# Altium PCB Router2.PcbDoc
Units mil, origin at the board's own origin, x right, y up, seen from the top; angles counter-clockwise.
Board outline 6000 x 4000 mil, 2 copper layers (Top Layer, Bottom Layer); 56 components, 29 nets, 161 pads, 14 vias.
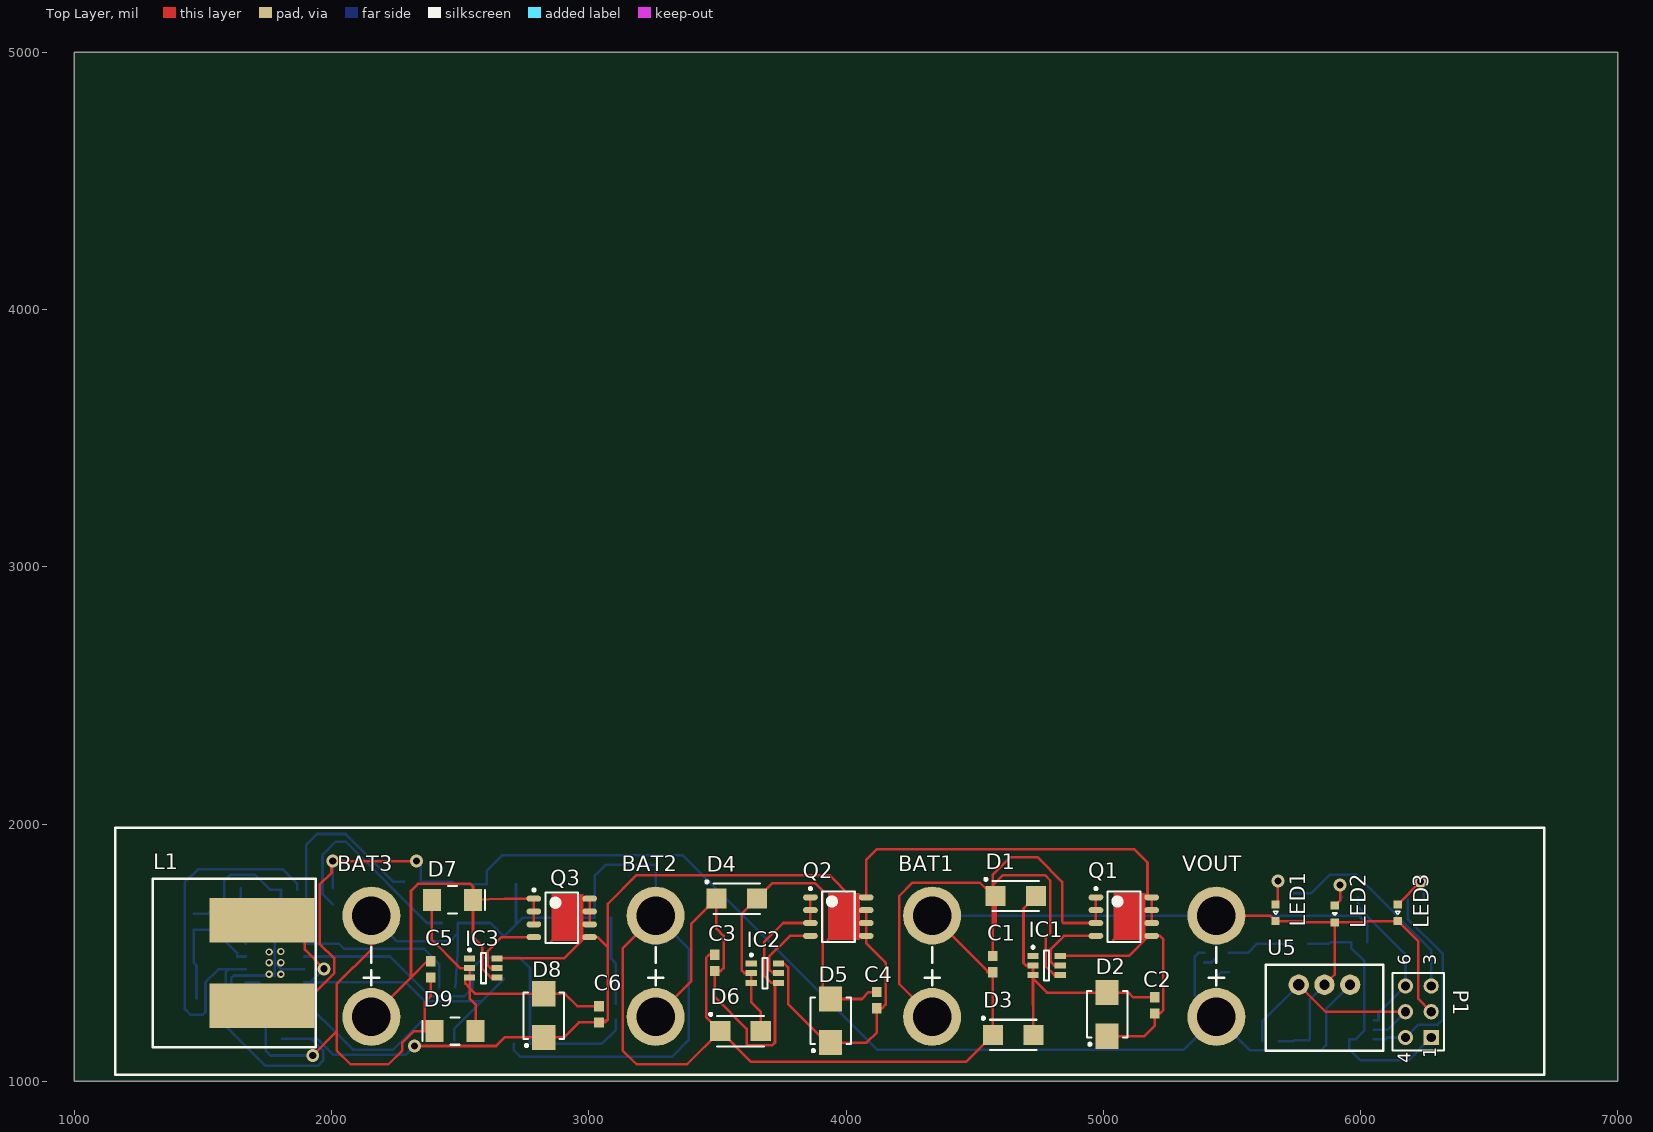
[diagram p0: Top Layer view]
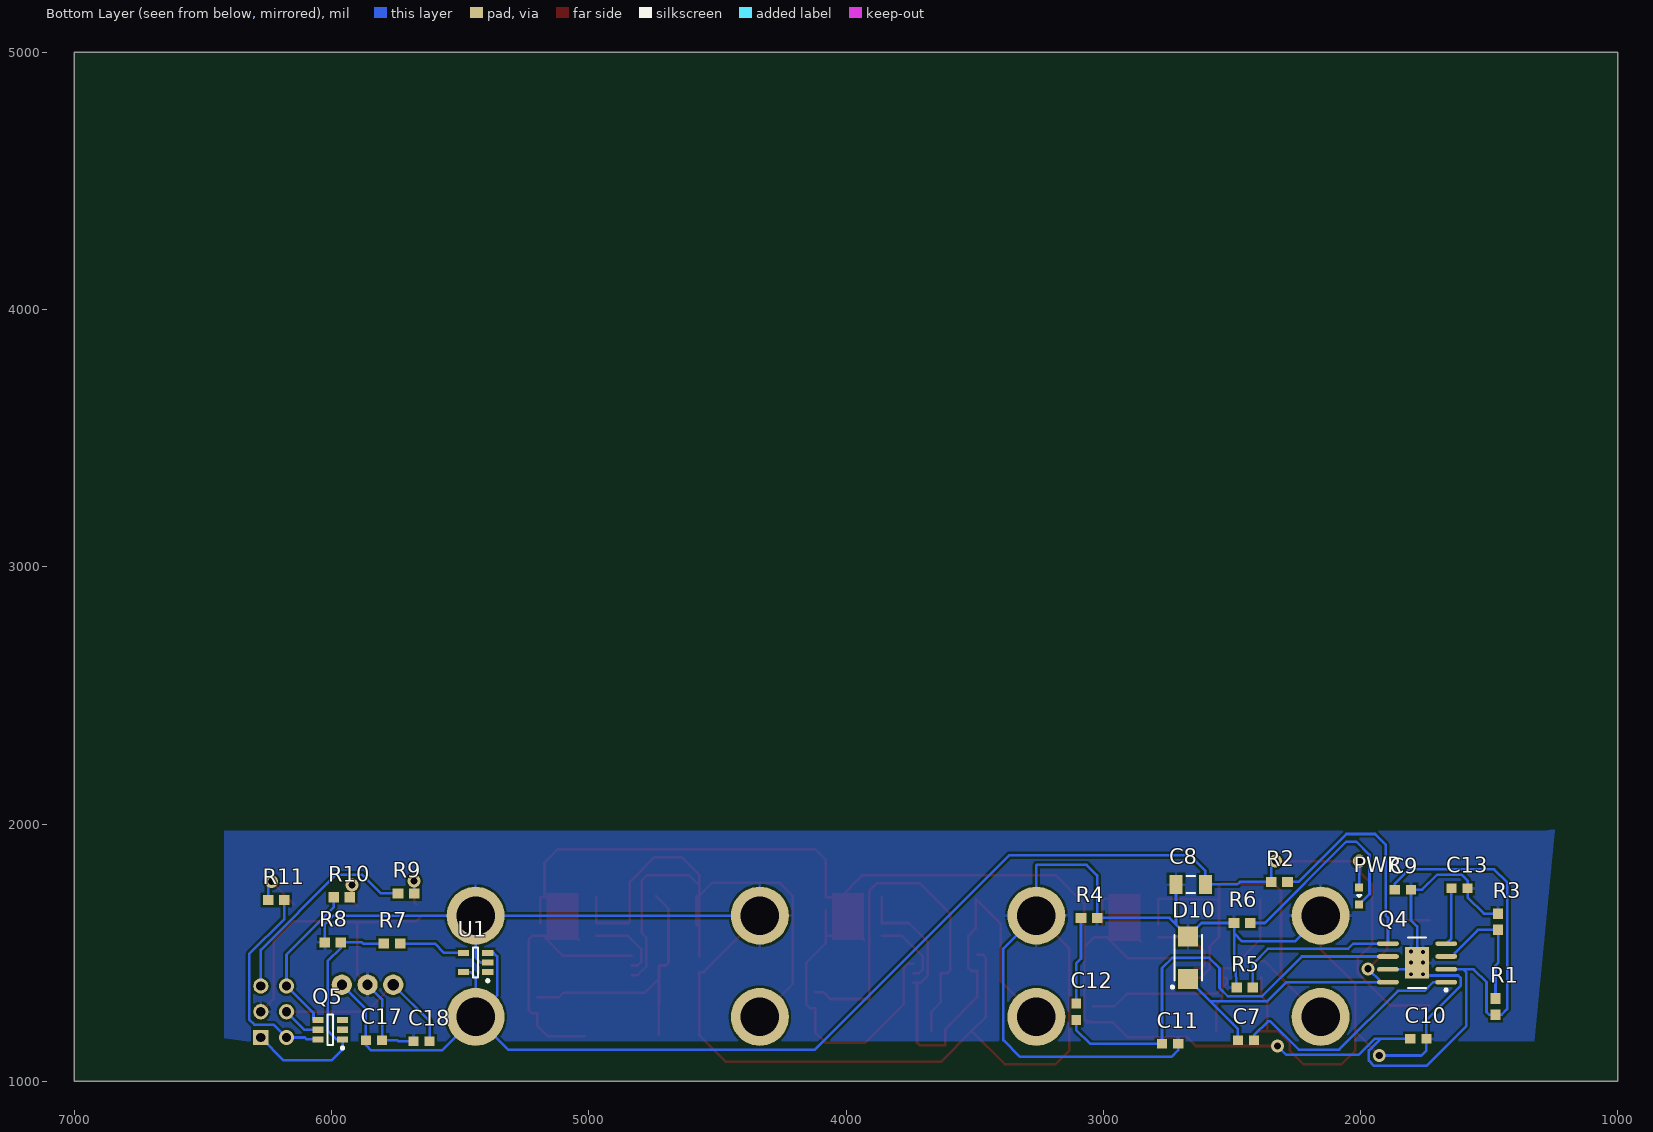
[diagram p1: Bottom Layer view, seen from below]

## Layer stack, top to bottom
Top Layer: signal copper 1.4
Dielectric: dielectric 12.6, FR-4, Dk 4.8
Bottom Layer: signal copper 1.4

## Board outline
1000,1000 7000,1000 7000,5000 1000,5000

## Design rules (kind name [scope] priority, off if disabled: settings)
Clearance [All] p1: gap=10
PolygonConnect [All] p1: connectstyle=Relief reliefconductorwidth=10 reliefentries=4 polygonreliefangle="90 Angle" airgapwidth=10
RoutingVias [All] p1: holewidth=28 width=50 viastyle="Through Hole" minholewidth=28 minwidth=50 maxholewidth=28 maxwidth=50
SolderMaskExpansion [All] p1: expansion=4
Width [All] p1: maxlimit=100 minlimit=10 preferedwidth=10
28 further rules are at their usual default settings.

## Classes and differential pairs
component class Switching_Regulator: C7 C8 C9 C10 C11 C12 C13 D10 L1 PWR Q4 R1 R2 R3 R4 R5 R6 VOUT
component class RouterBatteryLED: C17 C18 LED1 LED2 LED3 P1 Q5 R7 R8 R9 R10 R11 U1 U5
component class Batteries: BAT1 BAT2 BAT3 C1 C2 C3 C4 C5 C6 D1 D2 D3 D4 D5 D6 D7 D8 D9 IC1 IC2 IC3 Q1 Q2 Q3

## Components (designator, comment, footprint, x,y, rotation, side; value= is the part's Value field where it differs from the comment)
BAT1 "BATWIRE" BATWIRE12 4335,1250 r90 top
BAT2 "BATWIRE" BATWIRE12 3260,1250 r90 top
BAT3 "BATWIRE" BATWIRE12 2155,1250 r90 top
C1 "Cap" CAPC0603 4570,1455 r270 top
C2 "Cap" CAPC0603 5200,1295 r90 top
C3 "Cap" CAPC0603 3490,1460 r90 top
C4 "Cap" CAPC0603 4120,1315 r90 top
C5 "Cap" CAPC0603 2385,1435 r270 top
C6 "Cap" CAPC0603 3040,1260 r90 top
C7 "Cap" CAPC0603 2445,1160 r180 bottom
C8 "Cap" CAPC1206 2660,1765 r0 bottom
C9 "Cap" CAPC0603 1835,1745 r180 bottom
C10 "Cap" CAPC0603 1775,1165 r180 bottom
C11 "Cap" CAPC0603 2740,1145 r180 bottom
C12 "Cap" CAPC0603 3105,1270 r90 bottom
C13 "Cap" CAPC0603 1615,1750 r180 bottom
C17 "Cap" CAPC0603 5835,1160 r180 bottom
C18 "Cap" CAPC0603 5650,1155 r0 bottom
D1 "SS16T3G" SS16T3G 4660,1720 r0 top
D2 "SMBJ100A-13-F" SMBJ100A-13-F 5015,1260 r90 top
D3 "SS16T3G" SS16T3G 4650,1180 r0 top
D4 "SS16T3G" SS16T3G 3575,1710 r0 top
D5 "SMBJ100A-13-F" SMBJ100A-13-F 3940,1235 r90 top
D6 "SS16T3G" SS16T3G 3590,1195 r0 top
D7 "SS16T3G" SS110-TP 2470,1705 r180 top
D8 "SMBJ100A-13-F" SMBJ100A-13-F 2825,1255 r90 top
D9 "SS16T3G" SS110-TP 2480,1195 r0 top
D10 "DFLS160" RSX501L-20TE25 2670,1480 r90 bottom
IC1 "LM5050MK-2/NOPB" LM5050MK-2/NOPB 4780,1450 r0 top
IC2 "LM5050MK-2/NOPB" LM5050MK-2/NOPB 3685,1420 r0 top
IC3 "LM5050MK-2/NOPB" LM5050MK-2/NOPB 2590,1440 r0 top
L1 "37392C" 37392C 1730,1625 r180 top
LED1 "LED" LED0603 5670,1655 r270 top
LED2 "LED" LED0603 5900,1650 r270 top
LED3 "LED" LED0603 6145,1655 r270 top
P1 "Header 3X2A" HDR2X3_CEN 6275,1170 r90 top
PWR "LED" LED0603 2005,1720 r270 bottom
Q1 "TPCA8052-H(TE12LQM" TPCA8052-H(TE12LQM 5080,1640 r0 top
Q2 "TPCA8052-H(TE12LQM" TPCA8052-H(TE12LQM 3970,1640 r0 top
Q3 "TPCA8052-H(TE12LQM" TPCA8052-H(TE12LQM 2895,1635 r0 top
Q4 "TPS54332DDA" TPS54332DDA 1780,1460 r0 bottom
Q5 "ATTiny5 Atmel Processor" ATTiny5 6005,1200 r0 bottom
R1 "Res" RES0603 1475,1290 r90 bottom
R2 "Res" RES0603 2315,1775 r0 bottom
R3 "Res" RES0603 1465,1620 r90 bottom
R4 "Res" RES0603 3055,1635 r180 bottom
R5 "Res" RES0603 2450,1365 r180 bottom
R6 "Res" RES0603 2460,1615 r0 bottom
R7 "Res" RES0603 5765,1535 r180 bottom
R8 "Res" RES0603 5995,1540 r0 bottom
R9 "Res" RES0603 5710,1730 r180 bottom
R10 "Res" RES0603 5960,1715 r180 bottom
R11 "Res" RES0603 6215,1705 r0 bottom
U1 "IC OPAMP GP 600KHZ TSOT23-5" SOT95P280X100-5N 5440,1461.54 r0 bottom
U5 "R-78C5.0-1.0" R-78C5.0-1.0 5960,1375 r180 top
VOUT "BATWIRE" BATWIRE12 5440,1250 r90 top

## Footprints (in the part's own frame and the unit in brackets; to place one, negate y for a bottom-side part, rotate by r counter-clockwise, add the part's x,y. Pads: shape width x height; smd on the part's side, far side on the other; paste and mask are expansions set on the pad)
37392C [mm] "INDUCTOR 3.90UH 10.0A SMD"
  rect 10.4x4.4 smd: 0(0,8.4) 1(0,0)
  silkscreen extent -5.3,-4.1 10.8,12.5, body extent -5.5,-4.3 11,12.6, height 6.8
ATTiny5 [mm] "SOT23, 6-Leads, Body 2.90x2.80mm, Pitch 0.95mm, IPC Medium Density"
  rect 1.1x0.6 smd: 1(-1.2,0.95) 2(-1.2,0) 3(-1.2,-0.95) 4(1.2,-0.95) 5(1.2,0) 6(1.2,0.95)
  silkscreen extent -1.32,-1.5 0.25,1.92, body extent -0.87,-1.5 0.87,1.5, height 1.45
BATWIRE12 [mm] "Two 12AWG wires soldered directly to the board"
  round 5.715 hole 3.81: +(0,0) -(10,0)
  silkscreen extent 3.13,-0.75 6.87,0.75
CAPC0603 [mm] "Chip Capacitor, 2-Leads, Body 1.60x0.80mm, IPC Medium Density"
  rect 1x0.95 smd: 1(-0.8,0) 2(0.8,0)
  body extent -0.88,-0.48 0.87,0.48, height 0.8
CAPC1206 [mm] "Chip Capacitor, 2-Leads, Body 3.20x1.60mm, IPC Medium Density"
  rect 1.3x1.85 smd: 1(-1.45,0) 2(1.45,0)
  silkscreen extent -0.4,-0.82 0.4,0.82, body extent -1.7,-0.9 1.7,0.9, height 1.8
HDR2X3_CEN [mm] "Connector; Header; 3x2 Position"
  rect 1.5x1.5 hole 0.9: 1(0,0)
  round 1.5 hole 0.9: 2(2.54,0) 3(5.08,0) 4(0,2.54) 5(2.54,2.54) 6(5.08,2.54)
  silkscreen extent -1.27,-1.27 6.35,3.81
LED0603 [mm] "Chip LED, 2-Leads, Body 1.60x0.80mm, IPC Medium Density"
  rect 0.8x0.8 smd: A(-0.825,0) C(0.825,0)
  silkscreen extent -0.13,-0.25 0.13,0.25, body extent -0.88,-0.48 0.87,0.47, height 0.8
LM5050MK-2/NOPB [mm] "IC OR CTRLR N+1 6SOT"
  rect 1.1x0.6 smd: 1(-1.35,0.95) 2(-1.35,0) 3(-1.35,-0.95) 4(1.35,-0.95) 5(1.35,0) 6(1.35,0.95)
  silkscreen extent -1.47,-1.5 0.25,1.92, body extent -0.87,-1.52 0.87,1.53, height 1.1
R-78C5.0-1.0 [mm] "CONV DC/DC 1A 5V OUT SIP VERT"
  round 2 hole 1: 1(0,0) 2(2.54,0)
  round 2 hole 1.15: 3(5.08,0)
  silkscreen extent -3.26,-2 8.34,6.5, body extent -3.2,-1.9 8.3,6.5, height 10.8
RES0603 [mm] "Chip Resistor, 2-Leads, Body 1.60x0.80mm, IPC Medium Density"
  rect 1.05x1 smd: 1(-0.8,0) 2(0.8,0)
  body extent -0.88,-0.48 0.87,0.47, height 0.8
RSX501L-20TE25 [mm] "DIODE SCHOTTKY 20V 5A PMDS"
  rect 2x2 smd: A(2.1,0) C(-2.1,0)
  silkscreen extent -3.02,-1.35 2.25,1.68, body extent -2.25,-1.3 2.25,1.3, height 2
SMBJ100A-13-F [mm] "TVS DIODE 100VWM 162VC SMB"
  rect 2.5x2.3 smd: A(2.15,0) C(-2.15,0)
  silkscreen extent -3.07,-2 2.3,2, body extent -2.29,-1.97 2.28,1.97, height 2.62
SOT95P280X100-5N [mm] "SOT23, 5-Leads, Body 2.90x2.80mm, Pitch 0.95mm, IPC Medium Density"
  rect 1.1x0.6 smd: 1(-1.2,0.95) 2(-1.2,0) 3(-1.2,-0.95) 4(1.2,-0.95) 5(1.2,0.95)
  silkscreen extent -1.32,-1.5 0.25,1.92, body extent -0.87,-1.5 0.87,1.5, height 1
SS16T3G [mm] "DIODE SCHOTTKY 60V 1A SMA"
  rect 2x2 smd: A(2,0) C(-2,0)
  silkscreen extent -3.07,-1.5 2.3,1.77, body extent -2.29,-1.46 2.28,1.46, height 2.2
SS110-TP [mil] "DIODE SCHOTTKY 100V 1A SMA"
  rect 70x85 smd: A(80,0) C(-80,0)
  silkscreen extent -127,-53 18,53, body extent -84,-52 84,52, height 116
TPCA8052-H(TE12LQM [mm] "MOSFET N-CH 40V 20A 8SOP"
  oval 1.45x0.6 smd: D(2.75,-1.905) D(2.75,-0.635) D(2.75,0.635) D(2.75,1.905) G(-2.75,-1.905) S(-2.75,-0.635) S(-2.75,0.635) S(-2.75,1.905)
  Top Layer region: -1.025,-2.3 2.15,-2.3 2.15,2.35 -1.025,2.35
  silkscreen extent -2.87,-2.5 1.62,2.88, body extent -2.5,-2.5 2.5,2.5, height 0.95
TPS54332DDA [mm] "IC REG BUCK ADJ 3.5A 8SOPWRPAD"
  oval 2.15x0.45 smd: 1(-2.875,1.905) 2(-2.875,0.635) 3(-2.875,-0.635) 4(-2.875,-1.905) 5(2.875,-1.905) 6(2.875,-0.635) 7(2.875,0.635) 8(2.875,1.905)
  rect 2.4x3.1 smd: 7(0,0)
  silkscreen extent -3,-2.5 0.9,2.8, body extent -2,-2.5 2,2.5, height 1.7

## Part data
BAT1 BAT2 BAT3 VOUT: "Two large gauge leads soldered directly to the board."
D1 D3 D4 D6 D7 D9: "DIODE SCHOTTKY 60V 1A SMA"
D2 D5 D8: "TVS DIODE 100VWM 162VC SMB"
D10: "1.0A Surface Mount Schottky Barrier Rectifier"
IC1 IC2 IC3: "IC OR CTRLR N+1 6SOT"
L1: "INDUCTOR 3.90UH 10.0A SMD"
P1: "Header, 3-Pin, Dual row"
Q1 Q2 Q3: library part TPCA8052-H, "MOSFET N-CH 40V 20A 8SOP"
Q4: "IC REG BUCK ADJ 3.5A 8SOPWRPAD"
U5: "CONV DC/DC 1A 5V OUT SIP VERT"

## Via types
v1: diameter 50, hole 28, Top Layer to Bottom Layer, 8 vias
v2: diameter 29, hole 15, Top Layer to Bottom Layer, tented both sides, 6 vias

## Nets (pads, with @x,y where several pads share a name; then routed paths per layer and width w, separated by ;. In a path a pad name is that pad's centre, name@x,y a point inside that pad or via, vN(x,y) a via of type N, cw(c..) or ccw(c..) an arc to the next point about the centre after c; other vN are vias at no path point)
5V: C18.1 P1.5 Q5.5 U5.3 | length 888.9
  Top Layer w10: U5.3 5865,1270 P1.5
  Bottom Layer w10: C18.1 5618.5,1233.5 U5.3 ; Q5.5 6105,1200 P1.5
12V: C8.1 C17.1 L1.0 PWR.A R2.2 U1.3 U1.5 U5.1 VOUT.+ | length 6156.7
  Top Layer w10: L1.0 1885.29,1294.29 2011,1420 2011,1477.39 1954,1534.39 1954,1764 2000,1810 2000,1851 v1(2005,1856) v1(2330.5,1856)
  Bottom Layer w10: PWR.A v1(2005,1856) ; v1(2330.5,1856) 2346.5,1840 R2.2 2469,1775 2479,1765 C8.1 2602.91,1817 2664.91,1879 3365,1879 4122,1122 5312,1122 VOUT.+ ; U1.3 5370,1498.94 5356,1484.94 5356,1334 VOUT.+ ; U1.5 5460,1424.13 5440,1404.13 VOUT.+ ; U5.1 5866.5,1281.5 C17.1 5866.5,1140 5846.5,1120 5570,1120 VOUT.+
BATT1: BAT1.+ C1.1 D1.C IC1.4 Q1.S | length 2759.4
  Top Layer w10: BAT1.+ 4207,1378 4207,1720 4259,1772 4520,1772 D1.C@4570,1722 ; C1.1 4570,1597 ; D1.C 4581.26,1608.26 4570,1597 ; IC1.4 4810,1412.6 4776.5,1446.1 4776.5,1557.97 4794,1575.47 4794,1780 4773,1801 4611,1801 4570,1760 ; Q1.S@4971.73,1715 4971.73,1665 4971.73,1615 4845,1615 4840,1620 4840,1775 4744,1871 4640,1871 4570,1801 4570,1760 ; 4570,1597 D1.C@4570,1722 ; D1.C@4570,1722 4570,1760
BATT2: BAT2.+ C3.1 D4.C IC2.4 Q2.S | length 2073.7
  Top Layer w10: BAT2.+ 3399,1389 3399,1612.74 D4.C 3496.26,1593 3524,1565.26 3524,1440 3512.5,1428.5 C3.1 3490,1327 3614,1203 3614,1140 3714,1140 3724,1150 IC2.4@3724,1382.6 ; IC2.4 IC2.4@3724,1382.6 ; Q2.S@3861.73,1715 3861.73,1665 3861.73,1615 3756,1615 3681.5,1540.5 3681.5,1411.1 3710,1382.6 IC2.4@3724,1382.6
BATT3: BAT3.+ C5.1 D7.C IC3.4 Q3.S | length 1655.4
  Top Layer w10: BAT3.+ 2309,1404 ; C5.1 2371.5,1466.5 2309,1404 ; IC3.4 2620,1402.6 2586.5,1436.1 2586.5,1524.5 2550,1561 D7.C ; Q3.S@2786.73,1610 2786.73,1660 2786.73,1710 2673,1710 D7.C ; 2309,1404 2309,1740 2336,1767 2540,1767 2550,1757 D7.C
GND: BAT1.- BAT2.- BAT3.- C1.2 C3.2 C5.2 C8.2 C9.2 C10.2 C11.2 C13.2 C17.2 C18.2 D3.C D6.C D9.C D10.A LED1.C LED2.C LED3.C P1.2 Q4.7 R3.2 R4.2 R5.1 R6.2 R8.2 U1.2 U5.2 VOUT.- | length 13154
  Top Layer w10: v1(1927,1100) 2020,1193 ; BAT3.- 2155,1512.39 2020,1377.39 2020,1193 ; C5.2 2385,1329.67 2362.83,1307.5 2362.83,1195 ; D9.C 2362.83,1195 ; BAT2.- 3132,1515.7 3132,1120 3186,1066 3382.26,1066 D6.C ; C3.2 3467.5,1491.5 3456,1480 3456,1250.26 D6.C ; BAT1.- 4550,1428.7 4550,1423.5 C1.2 4570,1302.26 4571.26,1301 D3.C 4466.26,1075 3631.26,1075 D6.C ; VOUT.- 5648.82,1643.7 LED1.C 5782,1622.52 5787,1617.52 LED2.C ; U5.2 5900,1415 LED2.C ; P1.2 6225,1320 6225,1542.52 LED3.C 6025,1622.52 6020,1617.52 LED2.C ; 2020,1193 2020,1120 2074,1066 2221,1066 2275,1120 2275,1150 2320,1195 2362.83,1195
  Bottom Layer w10: R3.2 1520,1651.5 1583.5,1715 C13.2 1583.5,1780 1607.01,1803.5 1701.5,1803.5 1760,1745 C9.2 1803.5,1625.5 1780,1602 Q4.7@1780,1460 ; Q4.7@1893.19,1435 1805,1435 Q4.7@1780,1460 ; v1(1927,1100) 1763.5,1100 1743.5,1120 C10.2 1743.5,1237.64 1609.49,1371.65 1609.49,1400.49 1620,1411 1780,1411 Q4.7@1780,1460 ; BAT3.- 2254.7,1544 2460,1544 2491.5,1575.5 ; R5.1 2491.5,1495 2491.5,1575.5 ; C11.2 2708.5,1120.5 2734,1095 3323,1095 3388,1160 3388,1515.7 BAT2.- 3260,1840 3258.5,1841.5 3065.01,1841.5 3023.5,1800 R4.2 2742.32,1635 2717.09,1609.76 ; C8.2 2717.09,1609.76 ; BAT1.- 4335.3,1644 5439.7,1644 VOUT.- ; U1.2 5420,1461.54 5440,1481.54 VOUT.- ; C18.2 5740,1155 5745,1160 C17.2 5803.5,1318.5 U5.2 ; R8.2 6026.5,1610 5992.8,1643.7 VOUT.- ; 2491.5,1575.5 R6.2 2617.68,1615 D10.A 2717.09,1609.76
  other v2: 1757,1415.71 1803,1415.71 1757,1460.98 1803,1460.98 1757,1502.32 1803,1504.29
NetC2_2: C2.2 D1.A D2.A D3.A IC1.2 IC1.3 | length 1109.9
  Top Layer w10: D3.A 4728.74,1295 4726.85,1296.89 4726.85,1399.15 ; D1.A 4690,1671.26 4690,1460 4700,1450 IC1.2 IC1.3 ; C2.2 5116.15,1326.5 5098,1344.65 D2.A 4781.35,1344.65 4726.85,1399.15 ; 4726.85,1399.15 IC1.3 ; 4726.85,1399.15 4726,1400 4726,1412.6 IC1.3
NetC4_2: C4.2 D4.A D5.A D6.A IC2.2 IC2.3 | length 1521.2
  Top Layer w10: D6.A 3668.74,1270 3631.85,1306.89 IC2.3 IC2.2 3605,1420 3595,1430 3595,1651.26 D4.A 3713.74,1770 3880,1770 3909,1741 3909,1319.65 D5.A 4061.43,1319.65 4088.28,1346.5 C4.2
NetC6_2: C6.2 D7.A D8.A D9.A IC3.2 IC3.3 | length 1198.3
  Top Layer w10: D7.A 2390,1550 2500,1440 IC3.2 IC3.3 ; D9.A 2560,1299 2536.85,1322.15 2536.85,1362.8 ; C6.2 2956.15,1291.5 2908,1339.65 D8.A 2560,1339.65 2536.85,1362.8 ; 2536.85,1362.8 IC3.3 ; 2536.85,1362.8 2520,1379.65 2520,1402.6 IC3.3
NetC7_1: C7.1 D10.C L1.1 Q4.8 | length 1496.8
  Top Layer w10: L1.1 1896,1625 1896,1512 v1(1971,1437)
  Bottom Layer w10: Q4.8 Q4.8@1919,1385 ; v1(1971,1437) Q4.8@1919,1385 ; C7.1 2476.5,1203.82 2582.99,1310.31 ; D10.C 2582.99,1310.31 ; Q4.8@1919,1385 2288.15,1385 2362.83,1310.31 2582.99,1310.31
NetC7_2: C7.2 Q4.1 | length 942.9
  Bottom Layer w10: Q4.1 1717,1385 1751,1351 1855,1351 2083.5,1122.5 2240,1122.5 2350.5,1233 2360,1233 2413.5,1179.5 C7.2
NetC11_1: C11.1 C12.1 Q4.6 | length 1756.2
  Bottom Layer w10: Q4.6 2228.15,1485 2382.83,1330.31 2516,1330.31 2548,1362.31 2548,1440 2588,1480 2731.5,1480 2771.5,1440 C11.1 3050,1145 3105,1200 C12.1
NetC12_2: C12.2 R4.1 | length 341.2
  Bottom Layer w10: R4.1 3086.5,1476.5 3105,1458 C12.2
NetC13_1: C13.1 Q4.4 | length 223.4
  Bottom Layer w10: C13.1 1646.5,1555.31 Q4.4
NetIC1_5: IC1.5 Q1.G | length 289.2
  Top Layer w10: IC1.5 4810,1450 4796.5,1463.5 4796.5,1514.21 4847.28,1565 Q1.G
NetIC2_5: IC2.5 Q2.G | length 286.1
  Top Layer w10: IC2.5 3716,1420 3701.5,1434.5 3701.5,1484.21 3782.28,1565 Q2.G
NetIC3_5: IC3.5 Q3.G | length 298.2
  Top Layer w10: IC3.5 2617.5,1440 2606.5,1451 2606.5,1505 2661.5,1560 Q3.G
NetLED1_A: LED1.A R9.2 | length 142.5
  Top Layer w10: LED1.A 5679,1696.48 v1(5679,1778)
  Bottom Layer w10: R9.2 5678.5,1777.5 v1(5679,1778)
NetLED2_A: LED2.A R10.2 | length 144.7
  Top Layer w10: LED2.A 5921,1703.48 v1(5921,1763)
  Bottom Layer w10: v1(5921,1763) 5921,1715 R10.2
NetLED3_A: LED3.A R11.2 | length 202
  Top Layer w10: LED3.A v1(6233.76,1776.24)
  Bottom Layer w10: v1(6233.76,1776.24) 6246.5,1763.5 R11.2
NetPWR_C: PWR.C R6.1 | length 824.6
  Bottom Layer w10: PWR.C 1965,1727.52 1965,1880 2016,1931 2056,1931 2372,1615 R6.1
NetQ4_3: Q4.3 R1.2 R3.1 | length 523.7
  Bottom Layer w10: R1.2 1475,1450 1465,1460 R3.1 1543,1588.5 1633,1498.5 1633,1485 Q4.3
NetQ4_5: Q4.5 R2.1 R5.2 | length 1513.8
  Bottom Layer w10: R2.1 2241,1775 2055,1961 1943,1961 1902,1920 1902,1644 1893,1635 1893,1535 Q4.5 2028,1535 2048,1515 2360,1515 2418.5,1456.5 R5.2
NetR7_2: R7.2 U1.4 | length 261.2
  Bottom Layer w10: U1.4 5561.94,1498.94 5598,1535 R7.2
PB2: P1.6 Q5.4 R10.1 | length 614.9
  Bottom Layer w10: R10.1 5991.5,1675.94 6175,1492.43 P1.6 6070.1,1265.1 6070.1,1237.4 Q5.4
PB3/RESET: P1.4 Q5.6 R11.1 | length 821.4
  Bottom Layer w10: Q5.6 6096.4,1162.6 6103.81,1170 P1.4 6225,1220 6300,1220 6320,1240 6320,1494.29 6183.5,1630.78 R11.1
RAIL+: C2.1 C4.1 C6.1 C9.1 C10.1 D2.C D5.C D8.C IC1.6 IC2.6 IC3.6 Q1.D Q2.D Q3.D Q4.2 R1.1 | length 10283.3
  Top Layer w10: v1(2323,1137) 2639.65,1137 2673,1170.35 D8.C 2903,1170.35 2961.15,1228.5 C6.1 ; IC3.6 2904.4,1477.4 Q3.D@2987,1560 ; 2854.65,1544.45 2870.2,1560 2969,1560 ; Q3.D@3003.27,1610 3003.27,1660 3003.27,1710 2969,1710 2969,1560 ; IC2.6 3760,1457.4 3775,1442.4 3775,1300.35 3925,1150.35 D5.C 4080,1150.35 4120,1190.35 C4.1 4140,1283.5 4154,1297.5 4154,1461 4078,1537 Q2.D@4078,1565 ; 3929.65,1549.45 3945.2,1565 4040,1565 ; Q2.D@4078.27,1665 4078.27,1615 4078.27,1565 Q2.D@4078,1565 ; Q2.D@4078.27,1715 Q2.D@4078,1715 ; IC1.6 5099.4,1487.4 Q1.D@5177,1565 ; D2.C 5160,1175.35 5200,1215.35 C2.1 5220.5,1263.5 5234,1277 5234,1551 5220,1565 5188.27,1565 Q1.D@5177,1565 ; 5039.65,1549.45 5055.2,1565 5150,1565 ; Q1.D@5188.27,1615 5188.27,1665 5188.27,1715 Q1.D@5172,1715 ; 2969,1560 Q3.D@2987,1560 ; Q3.D@2987,1560 3003.27,1560 3034,1560 3074,1520 ; C6.1 3074,1240 ; C6.1 3062.5,1228.5 3074,1240 ; 3074,1240 3074,1520 ; 3074,1520 3074,1690 3185,1801 3936,1801 4022,1715 4040,1715 ; 4040,1565 Q2.D@4078,1565 ; 4040,1565 4040,1715 ; 4040,1715 Q2.D@4078,1715 ; Q2.D@4078,1715 4078,1860 4120,1902 5120,1902 5172,1850 Q1.D@5172,1715 ; 5150,1565 Q1.D@5177,1565 ; 5150,1565 5150,1715 Q1.D@5172,1715
  Bottom Layer w10: Q4.2 1600,1435 ; C10.1 1922,1165 ; C9.1 1866.5,1768.5 1811,1824 1480,1824 1430,1774 1430,1280 1451.5,1258.5 R1.1 1500,1258.5 1510,1268.5 1510,1385 1560,1435 1600,1435 ; v1(2323,1137) 2288.5,1102.5 2007.5,1102.5 1945,1165 1922,1165 ; 1600,1435 1589.49,1424.49 1589.49,1213.51 1743,1060 1947,1060 1967,1080 1967,1120 1922,1165
TPICLK/PB1: P1.3 R9.1 | length 825.7
  Bottom Layer w10: R9.1 5808,1730 5881,1803 5983,1803 6275,1511 P1.3
TPIDATA/PB0: P1.1 Q5.1 R7.1 R8.1 | length 1016.6
  Bottom Layer w10: R7.1 5877,1535 5882,1540 R8.1 5963.5,1518.5 6015,1467 6015,1197.6 5980,1162.6 Q5.1 5957,1162.6 5957,1124 6000,1081 6186,1081 P1.1
pads on no net: IC1.1 IC2.1 IC3.1 Q5.2 Q5.3 U1.1

## Polygon pours and split planes (outlines as drawn)
GND on Bottom Layer "Top Overlay-No Net" (solid, pour order 4): 1245,1980 1284.48,1974.47 6417.11,1974.47 6417.11,1167.1 6298.67,1150.51 6259.19,1156.04 1323.96,1156.04

## Silkscreen, mask and mechanical layers (free items; w line width, h text height)
Top Overlay:
  lines w10: 1160,1025 6715,1025 6715,1975 6715,1985 1160,1985 1160,1030 1160,1025

## Text inside footprints (layer, text, board x,y; h text height)
P1: Top Overlay "4" at 6195,1070 h50 r90; Top Overlay "1" at 6295,1090 h50 r90; Top Overlay "3" at 6295,1450 h50 r90; Top Overlay "6" at 6195,1450 h50 r90